# Altium PCB PCB2.PcbDoc
Units mil, origin at the board's own origin, x right, y up, seen from the top; angles counter-clockwise.
Board outline 2674.07 x 3796.52 mil, 2 copper layers (Top Layer, Bottom Layer); 37 components, 33 nets, 116 pads, 5 vias.
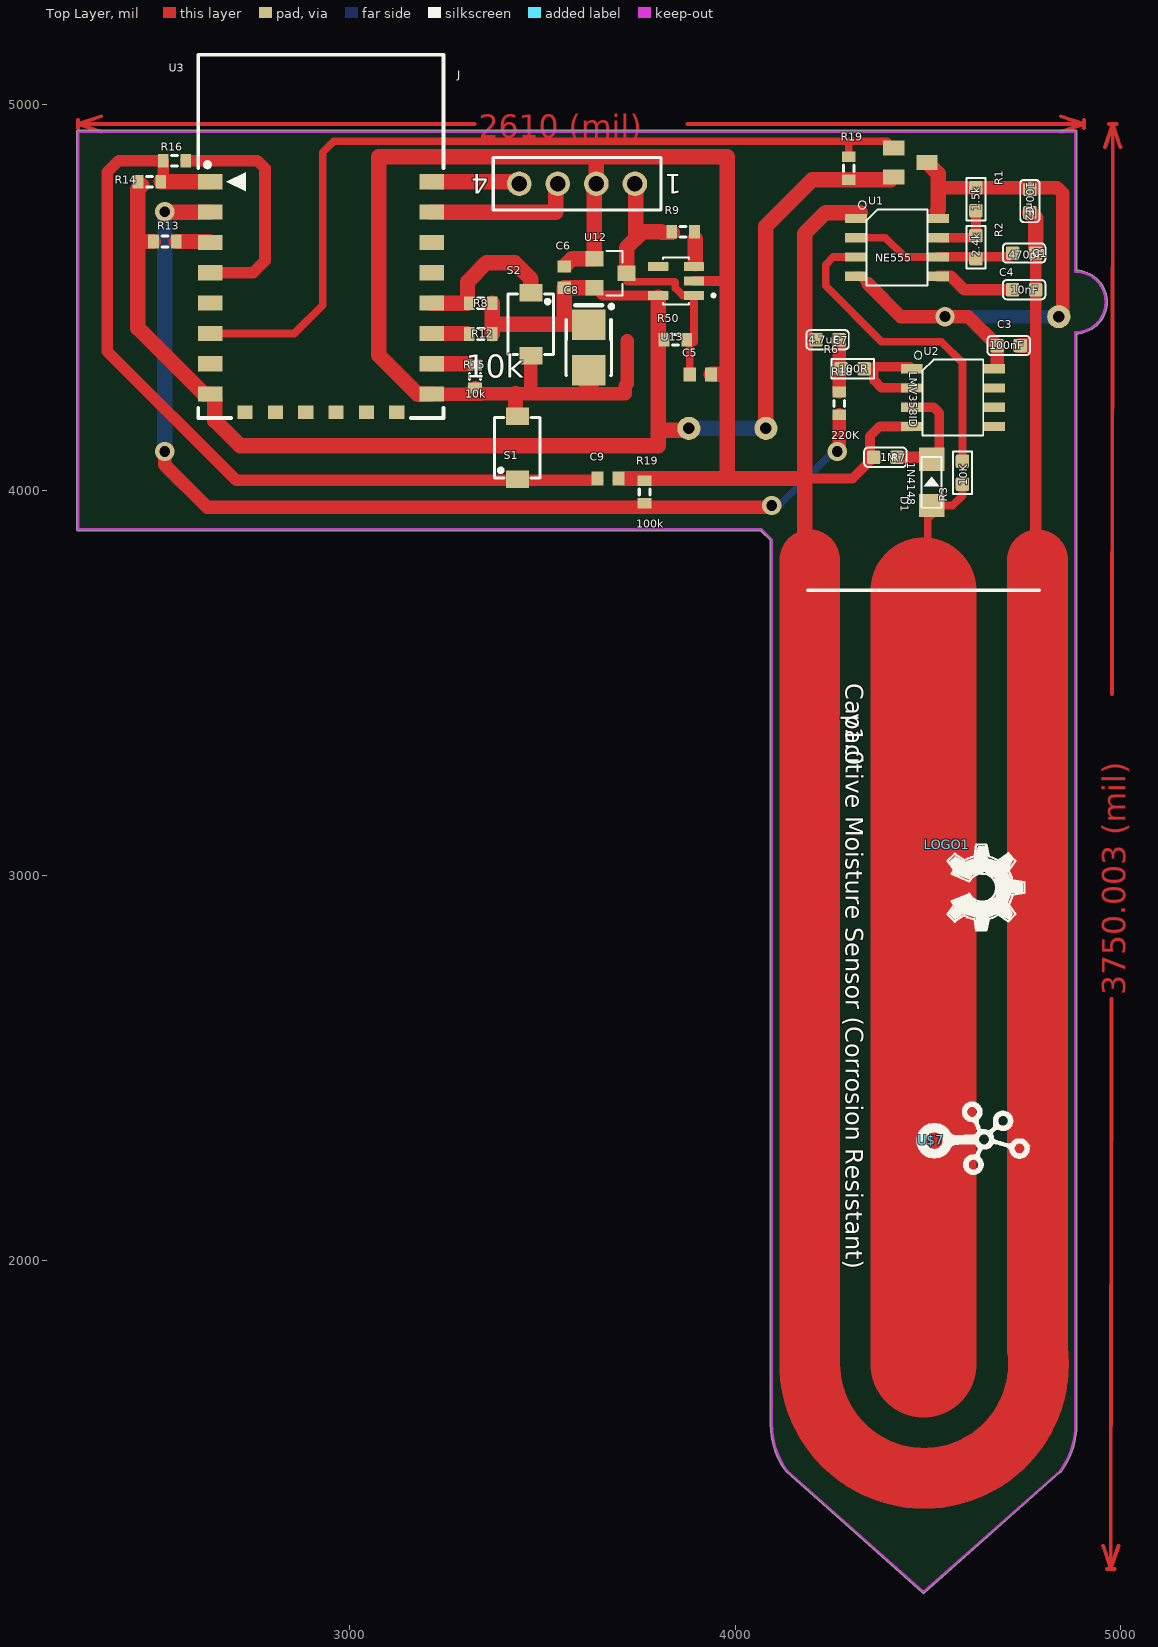
[diagram p0: Top Layer view]
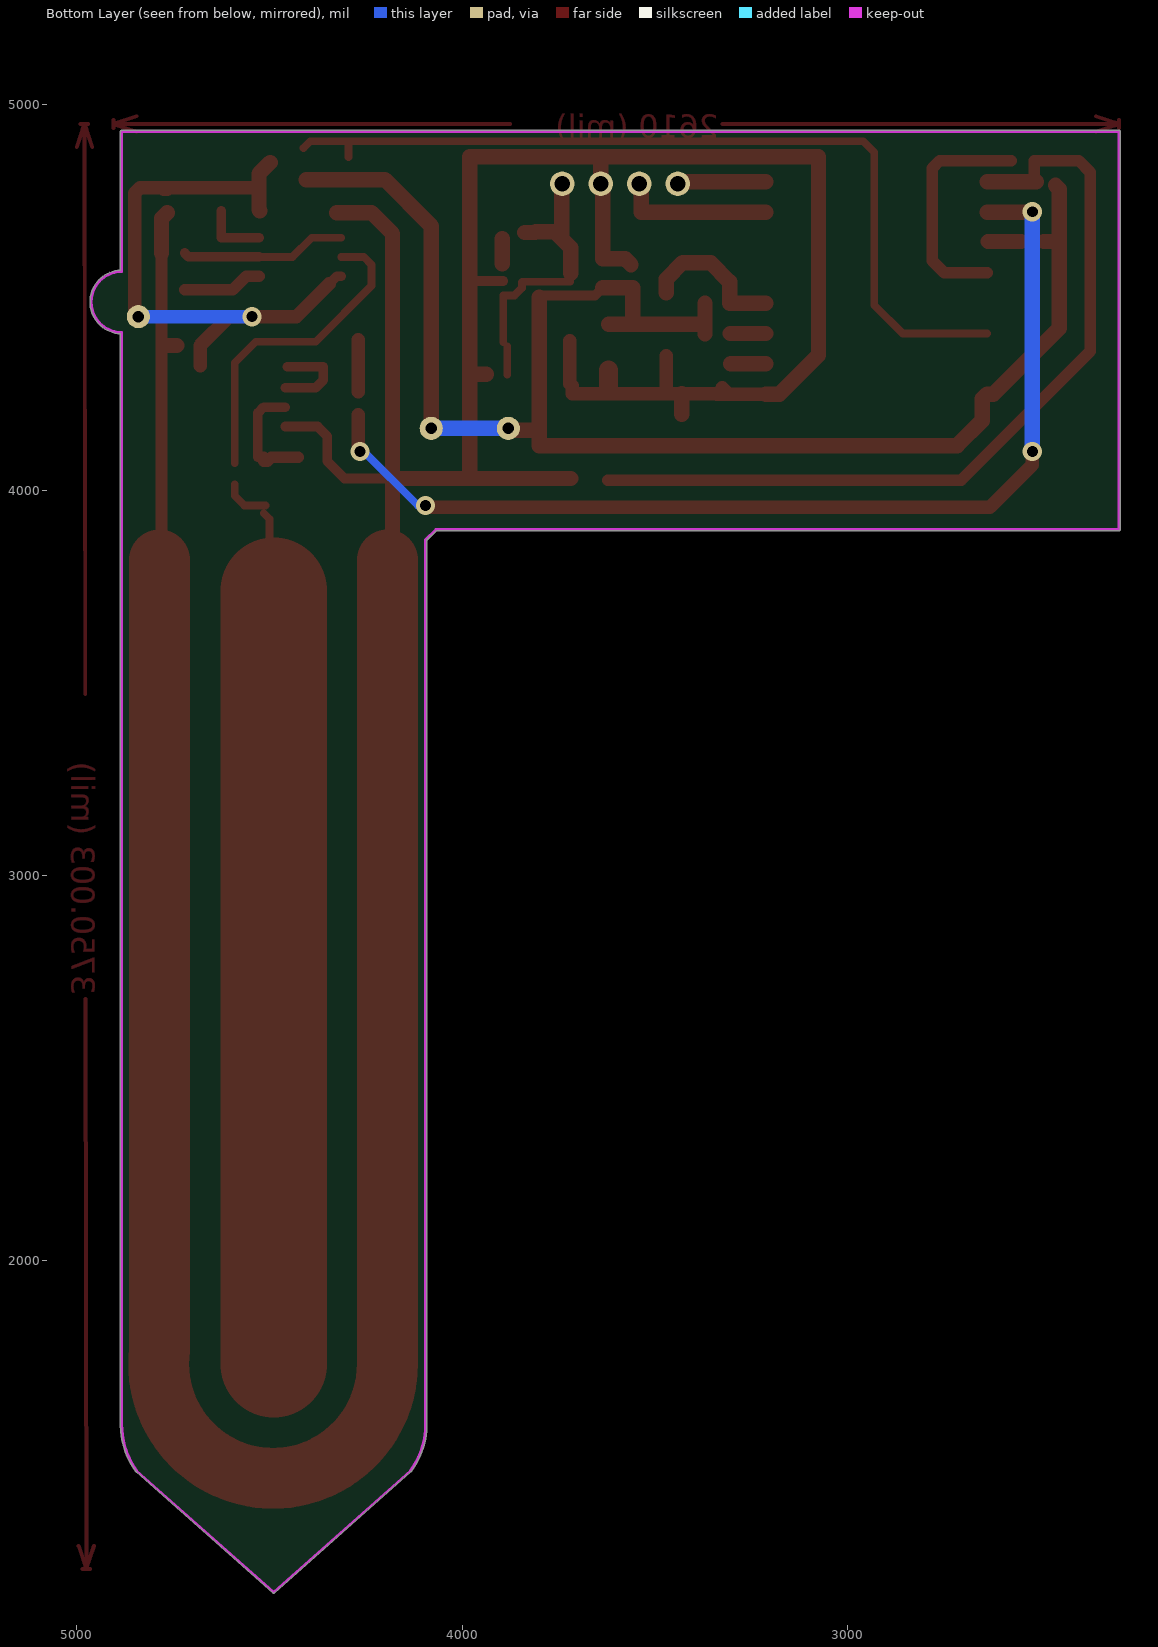
[diagram p1: Bottom Layer view, seen from below]

## Layer stack, top to bottom
Top Solder: solder mask 0.4, Solder Resist, Dk 3.5
Top Layer: signal copper 1.4
Dielectric 1: dielectric 12.6, FR-4, Dk 4.8
Bottom Layer: signal copper 1.4
Bottom Solder: solder mask 0.4, Solder Resist, Dk 3.5

## Board outline
4091.49,1575.01 4091.49,1614 cw(c4095,1614) 4091.49,1614.14 4091.49,3869.54 4066.54,3894.49 2295,3894.49 cw(c2295,3898) 2291.49,3898 2291.49,4930 cw(c2295,4930) 2295,4933.52 4883.04,4933.52 cw(c4883.04,4930) 4886.55,4930 4886.55,4570.44 cw(c4883.04,4488) 4965.55,4488 cw(c4883.04,4488) 4886.55,4405.56 4886.55,1575.01 cw(c4683.54,1573.5) 4886.56,1573.5 cw(c4683.54,1573.5) 4846.87,1452.91 cw(c4844.04,1455) 4844.69,1451.55 4491.04,1137.74 cw(c4489.04,1140) 4487.03,1137.75 4487.04,1137.74 4487.03,1137.75 ccw(c4489.04,1140) 4487.04,1137.74 4487.03,1137.75 4134.05,1451.55 cw(c4134.71,1455) 4131.89,1452.9 cw(c4294.85,1574.56)

## Design rules (kind name [scope] priority, off if disabled: settings)
Clearance Clearance_2 [All] p1: gap=10
Clearance Clearance_1 [All] p2: gap=10
Clearance [All] p3: gap=10
PolygonConnect [All] p1: connectstyle=Relief reliefconductorwidth=10 reliefentries=4 polygonreliefangle="90 Angle" airgapwidth=10
RoutingPriority RoutingPriority_1 [All] p1: routingpriority=0
RoutingPriority [All] p2: routingpriority=0
RoutingVias [All] p1: holewidth=28 width=50 viastyle="Through Hole" minholewidth=28 minwidth=50 maxholewidth=28 maxwidth=50
SolderMaskExpansion [All] p1: expansion=4
Width [All] p1: maxlimit=100 minlimit=10 preferedwidth=10
29 further rules are at their usual default settings.

## Classes and differential pairs
component class Sheet2: C1 C2 C3 C4 C7 D1 LOGO1 R1 R2 R3 R6 R7 R19 U1 U2 U$7 ""
component class Sheet1: C5 C6 C8 C9 J R8 R9 R12 R13 R14 R15 R16 R18 R19 R50 S1 S2 U3 U12 U13

## Components (designator, comment, footprint, x,y, rotation, side; value= is the part's Value field where it differs from the comment)
C1 "470pF" C0603 4750,4615 r270 top
C2 "100nF" C0603 4765,4750 r180 top
C3 "100nF" C0603 4710,4375 r270 top
C4 "10nF" C0603 4750,4519.99 r90.02 top
C5 "" 1608[0603] 3910,4300 r180 top
C6 "" 1608[0603] 3556.65,4552.4 r270 top
C7 "4.7uF" C0603 4240,4390 r270 top
C8 "100uF TAJB107M006RNJ" SMT_C_Tantalum_B 3620,4370 r270 top
C9 "100nf" 1608[0603] 3670,4030 r180 top
D1 "1N4148" LL-34 4510,4020 r270 top
J "SAMTEC-BCS-104-X-S-TE" SAMTEC-BCS-104-X-S-TE 3590,4795 r180 top
LOGO1 "LOGO-OSHW-FILLX0200-NT" OSHW_FILLX200_NOTEXT 4551.04,3080 r270 top
R1 "1.5k" R0603 4625,4755 r180.02 top
R2 "2.4k" R0603 4625,4630 r180.02 top
R3 "10K" R0603 4590,4045 r0 top
R6 "100R" R0603 4305,4315 r270 top
R7 "1M" C0603 4390,4085 r270 top
R8 "10k" J1-0603 3340,4485 r180 top
R9 "100k" J1-0603 3865,4670 r180 top
R12 "10k" J1-0603 3340,4405 r180 top
R13 "10k" J1-0603 2520,4645 r0 top
R14 "10k" J1-0603 2480,4800 r0 top
R15 "10k" J1-0603 3325,4295 r90 top
R16 "0R" J1-0603 2545,4855 r180 top
R18 "220K" J1-0603 4270,4225 r90 top
R19 "100k" J1-0603 3765,3995 r270 top
R19 "Res3" J1-0603 4295,4835 r270 top
R50 "0r" J1-0603 3845,4390 r180 top
S1 "reset" SMT_SW_PTS_820 3435,4110 r90 top
S2 "IO0" SMT_SW_PTS_820 3470,4430 r270 top
U1 "NE555" SOIC8-1.27-5X4MM 4420,4630 r270 top
U2 "LMV358ID" SOIC8-1.27-5X4MM 4565,4240 r270 top
U3 "ESP_12_E" ESP_12_E_L 2610,4800 r0 top
U12 "PMIC-XC6206P122MR(SOT23)" SOT-23 3676.65,4562.4 r270 top
U13 "AP2112K-3.3TRG1" SOT95P285X140-5N 3846.65,4542.4 r180 top
U$7 "LOGO-GROVE" GROVE-SILK-BIG 4509.04,2314 r270 top
? "AO3401" SOT23 4455,4850 r270 top

## Footprints (in the part's own frame and the unit in brackets; to place one, negate y for a bottom-side part, rotate by r counter-clockwise, add the part's x,y. Pads: shape width x height; smd on the part's side, far side on the other; paste and mask are expansions set on the pad)
1608[0603] [mm] "Chip Capacitor, Body 1.6x0.8mm, IPC High Density"
  rect 0.8x0.9 smd: 1(-0.7,0) 2(0.7,0)
  body extent -0.87,-0.48 0.87,0.48, height 1.3
C0603 [mil] "C0603"
  rrect25% 35x35 smd: 1(0,30) 2(0,-30)
  silkscreen extent -25,-55 25,55
ESP_12_E_L [mm]
  rect 1.6x1 smd: 1(0.7,0) 2(0.7,-2) 3(0.7,-4) 4(0.7,-6) 5(0.7,-8) 6(0.7,-10) 7(0.7,-12) 8(0.7,-14) 15(15.3,-14) 16(15.3,-12) 17(15.3,-10) 18(15.3,-8) 19(15.3,-6) 20(15.3,-4) 21(15.3,-2) 22(15.3,0)
  rect 1x0.9 smd: 9(3,-15.2) 10(5,-15.2) 11(7,-15.2) 12(9,-15.2) 13(11,-15.2) 14(13,-15.2)
  silkscreen extent -0.08,-15.57 16.08,8.37, body extent 0,-15.49 16,8.51, height 2.75
GROVE-SILK-BIG [mil] "GROVE-SILK-BIG"
  silkscreen extent -99,-38 91,257
J1-0603 [mm] "Chip Resistor, Body 1.6x0.8mm, IPC High Density"
  rect 0.7x0.9 smd: 1(-0.75,0) 2(0.75,0)
  silkscreen extent -0.2,-0.35 0.2,0.35, body extent -0.85,-0.48 0.85,0.48, height 0.9
LL-34 [mil] "LL-34"
  rect 60x66 smd: A(60,0) C(-60,0)
  silkscreen extent -66,-26 66,26
OSHW_FILLX200_NOTEXT [mil] "OSHW_FILLX200_NOTEXT"
  silkscreen extent 0,0 223,200
R0603 [mil] "R0603"
  rrect25% 35x35 smd: 1(0,30) 2(0,-30)
  silkscreen extent -25,-55 25,55
SAMTEC-BCS-104-X-S-TE [mm]
  round 1.62 hole 1.02 mask+0: 1(-3.81,0) 2(-1.27,0) 3(1.27,0) 4(3.81,0)
  silkscreen extent -5.53,-1.72 5.53,1.72
SMT_C_Tantalum_B [mm]
  rect 2x2.2 smd: 1(-1.5,0) 2(1.5,0)
  silkscreen extent -2.82,-1.5 1.85,1.63, body extent -1.75,-1.4 1.75,1.4, height 1.9
SMT_SW_PTS_820 [mm]
  rect 1.143x1.5 smd: 1(-2.075,0) 2(2.075,0)
  round 0 all layers, no hole paste-2.54 mask-2.54: MH1(0,0.9) MH2(0,-0.9)
  silkscreen extent -2,-1.5 2,1.5, body extent -2.25,-1.55 2.25,1.55, height 2.05
SOIC8-1.27-5X4MM [mil] "SOIC8-1.27-5X4MM"
  rect 24x56 smd: 1(-75,-106.3) 2(-25,-106.3) 3(25,-106.3) 4(75,-106.3) 5(75,107) 6(25,107) 7(-25,107) 8(-75,107)
  silkscreen extent -120,-100 99,79
SOT23 [mm]
  rect 1x1.4 smd: 1(-0.95,-1.1) 2(0.95,-1.1) 3(0,1.1)
SOT95P285X140-5N [mm]
  rrect15% 1.35x0.6 smd: 1(-1.185,0.95) 2(-1.185,0) 3(-1.185,-0.95) 4(1.185,-0.95) 5(1.185,0.95)
  silkscreen extent -2.57,-1.55 0.85,1.55
SOT-23 [mm]
  rect 1.016x1.2 smd: 1(-0.95,-1.06) 2(0.95,-1.06) 3(0,1.06)
  silkscreen extent -1.46,-0.25 1.46,0.8

## Part data
C1 C2 C3 C4 C7 R7: library part CAP-0603, "Ceramic Capacitors"
C5 C6 C9: library part "Cap Semi", "Capacitor (Semiconductor SIM Model)"
C8: library part SMT_C_Tantalum_B, "Capacitor, SM Tantalum; Body 3.5 x 2.8 mm (LxW typ)"
D1: library part DIODE*'1N4148-SMD'
J: "4 Position Receptacle Connector Through Hole"
R1 R2 R3 R6: library part RES-0603
R8 R9 R12 R13 R14 R15 R16 R18 R19 R50: library part Res3, "Resistor"
R19: "Resistor"
S1 S2: library part SMT_SW_PTS_820, "SMT Tactile ?Switch PTS 820 Series"
U1: library part CLOCK/TIMING-NE555'DR', "DIP-8:310110001;SOIC-8:310110013;TSSOP-8:310110002"
U2: library part AMPLIFIER-LMV358'D', "SOIC-8:310020002;MSOP-8:310020007"
U3: "ESP-12 Wi-Fi Module by AI-Thinker"
U12: "Linear Voltage Regulator IC Output"
U13: "Linear Voltage Regulator IC 1 Output 600mA SOT-25"
?: "P-Channel 30V 4A _Ta_ 1.4W _Ta_ Surface Mount SOT-23-3"

## Free pads (board coordinates)
  round 60 hole 30: 2(3880,4160) 3(4080,4160) 4(4840,4450)

## Via types
v1: diameter 50, hole 28, Top Layer to Bottom Layer, 5 vias

## Nets (pads, with @x,y where several pads share a name; then routed paths per layer and width w, separated by ;. In a path a pad name is that pad's centre, name@x,y a point inside that pad or via, vN(x,y) a via of type N, cw(c..) or ccw(c..) an arc to the next point about the centre after c; other vN are vias at no path point)
ADC: C7.1 R6.2 R18.2 | length 135.5
  Top Layer w35: R18.2 C7.1
ADC_IN: R18.1 R19.2@3765,3965.47 U3.2 | length 2716.1
  Top Layer w20: v1@4090,3965 v1(4095,3960) v1@4100,3955
  Top Layer w35: v1(2520,4100) 2520,4065 2630,3955 4080,3955 v1@4090,3965 ; v1@4270,4115 R18.1
  Top Layer w40: v1@2521.21,4721.26 U3.2
  Bottom Layer w20: v1(4095,3960) 4115,3960 4255,4100 v1(4265,4100)
  Bottom Layer w40: v1(2520,4100) v1(2520,4722.47)
EN: R13.2 U3.3 | length 85.6
  Top Layer w40: R13.2 U3.3@2635.08,4645
GND: C1.1 C2.1 C3.1 C4.2 C5.1 C6.1 C7.2 C8.2 C9.1 J.2 R7.2 R15.1 R19.1@3765,4024.53 S1.2 S2.2 U1.1 U2.4 U3.15 U12.1 U13.2 | length 11721.6
  Top Layer w10: 4183.72,3818 4193.76,3818 4193.76,3864 ; 4789.04,3858 4789.04,3822 4785.04,3818 4834.04,3818
  Top Layer w20: J.2@3634.92,4774.92 J.2@3645,4785 ; 4780,3877.04 4775,3872.04 4789.04,3858
  Top Layer w25: U13.2 3977.4,4542.4 ; 4180.48,4030 4305,4030 4350,4075 4350,4140 4375,4165 U2.4
  Top Layer w30: 4780,3877.04 C4.2 C1.1@4780,4605
  Top Layer w35: U3.15 3308.35,4248.82 ; R15.1 3308.35,4248.82 ; 3339.29,4248.82 3308.35,4248.82 ; 3340.47,4250 3430,4250 3470,4250 ; S2.2 3470,4250 ; 3714.55,4270.04 3714.55,4250 3470,4250 ; 3720,4275.49 3720,4387.44
  Top Layer w39.88: 4180.48,3845 4180.48,4030
  Top Layer w40: U3.15 3176.18,4248.82 3075,4350 3075,4865 3640,4865 ; S1.2@3430,4196.69 3430,4250 ; C6.1@3561.65,4584.96 3576.5,4599.8 U12.1@3622.85,4599.8 ; U12.1@3624.92,4599.8 U12.1 J.2@3634.92,4774.92 ; J.2@3640,4790 3640,4865 ; 3717.56,4030 4180.48,4030 4180.48,4665.48 4235,4720 4325,4720 ; C5.1 3975,4300 ; 3980,4035 3980,4865 3640,4865 ; C3.1 4770,4375 ; C2.1 4780,4705 C1.1
  Top Layer w50: 3620,4260 C8.2
  Top Layer w158: 4193.76,3818 4193.76,1732 ccw(c4490.56,1732.02) 4785.04,1769 4785.04,3818
GPIO0: R8.2 S2.1 U3.18 | length 387
  Top Layer w40: U3.18 3305.43,4485.04 3305.43,4540.43 3355,4590 3427.57,4590 3470,4547.57 S2.1
GPIO2: R12.2 U3.17 | length 91.8
  Top Layer w40: U3.17 R12.2@3304.17,4406.3
GPIO4: U3.19
GPIO5: U3.20
GPIO9: U3.11
GPIO10: U3.12
GPIO12: ?.1 R19.1@4295,4864.53 U3.6 | length 2255.7
  Top Layer w20: U3.6 2856.3,4406.3 2930,4480 2930,4876.5 2958.5,4905 4290,4905 ; R19.1@4295,4864.53 4295,4905 4394.09,4905 ?.1
GPIO13: U3.7
GPIO14: U3.5
GPIO15: R15.2 U3.16 | length 90.6
  Top Layer w40: U3.16 3302.91,4327.56
GPIO16: R16.1 U3.4 | length 609.1
  Top Layer w30: R16.1 2760,4855 2780,4835 2780,4595 2748.78,4563.78 U3.4
NetC1_2: C1.2 R2.1 U1.2 U1.6 | length 431.2
  Top Layer w20: U1.2 4390,4655 4440,4605 U1.6
  Top Layer w25: U1.6 4641.56,4605 4710,4605 C1.2
NetC4_1: C4.1 U1.5 | length 207.5
  Top Layer w30: U1.5 4560,4555 4595.01,4519.99 C4.1
NetD1_A: D1.A R3.2 | length 2342.7
  Top Layer w10: 4489.04,3739 4489.04,3816
  Top Layer w20: 4489.04,3816 4489.04,3824.04 4500,3835 4500,3925 D1.A@4515,3940 ; 4501.04,3842 4502.04,3840 ; D1.A 4565,3960 4590,3985 R3.2
  Top Layer w25: 4488.64,3816 4489.04,3816
  Top Layer w276: 4489.04,1731 4489.04,3739
NetD1_C: D1.C R7.1 U2.3 | length 296.7
  Top Layer w25: U2.3 4515,4215 4530,4200 D1.C@4530,4085
  Top Layer w30: R7.1@4425,4085 4495,4085 4505,4075 4515,4075 D1.C@4515,4085
NetR1_1: R1.1 R2.2 U1.7 | length 168
  Top Layer w25: U1.7 4624.99,4655 R1.1
NetR3_1: R3.1 U1.3 | length 839.8
  Top Layer w20: U1.3 4255,4605 4235,4584.99 4235,4530 4380,4385 4535,4385 4590,4330 R3.1@4590,4070
NetR6_1: R6.1 U2.1 U2.2 | length 235.7
  Top Layer w25: U2.1@4453.69,4320 4360,4320 4360,4285 4380,4265 U2.2
NetR9_1: R9.1 U13.3 | length 65.3
  Top Layer w40: U13.3@3896.18,4587.09 R9.1@3896.18,4652.4
NRST: C9.2 R14.2 R16.2 S1.1 U3.1 | length 2198.9
  Top Layer w30: R14.2@2515.47,4805.94 R16.2 2400,4855 2370,4825 2370,4360 2705,4025 3622.44,4025
  Top Layer w40: R14.2@2515.47,4805.94 2510,4800.47 2510,4800 U3.1
RXD0: J.3 U3.21 | length 397.6
  Top Layer w40: U3.21 3535,4721.26 3535,4775 J.3@3550,4790
SPI_CLK: U3.14
SPI_INT: U3.13
SPI_MISO: U3.10
SPI_MOSI: U3.9
TXD0: J.4 U3.22 | length 227.6
  Top Layer w40: U3.22 J.4@3440,4800
VBAT: C5.2 J.1 R9.2 R50.1 U12.3 U13.1 | length 752.4
  Top Layer w20: U12.3 3720,4560.79 3720,4540.67 3843.39,4540.67 3844.51,4539.55 3844.51,4524.55 3864.06,4505 U13.1 3893.31,4383.31 ; C5.2 R50.1@3882.44,4372.44
  Top Layer w40: U12.3 3718.39,4629.13 3759.25,4670 3808.35,4670 3810,4668.35 R9.2@3837.13,4668.35 ; 3741.65,4652.4 J.1@3741.65,4788.35
VCC3V3: ?.2 C6.2 C8.1 pad.2 pad.3 R8.1 R12.1 R13.1 R14.1 R19.2@4295,4805.47 R50.2 U3.8 U12.2 U13.5 | length 4219.8
  Top Layer w25: U12.2 3654.92,4505 U13.5 U13.5@3800,4500.67
  Top Layer w40: 2450,4645 R13.1 ; R14.1@2460,4790.47 2450,4780.47 2450,4420 2621.18,4248.82 U3.8 2650,4236.38 2650,4180 2715,4115 3800,4115 3800,4155 ; R12.1 R8.1 3369.53,4430 3556.65,4430 ; C6.2 3556.65,4430 ; C6.2@3556.81,4525 U12.2 ; C8.1@3619.06,4430 3556.65,4430 ; U13.5@3800,4500.67 3800,4155 ; pad.2@3875,4155 3800,4155 ; pad.3 4080,4685 4200.47,4805.47 4295,4805.47 ?.2@4404.57,4805.47
  Bottom Layer w40: pad.2 pad.3
VCC_SEN: ?.3 C2.2 C3.2 pad.4 R1.2 U1.4 U1.8 U2.8 | length 1590.8
  Top Layer w25: U1.4 4325,4555 4345,4535
  Top Layer w35: 4345,4535 4430,4450 v1(4545,4450) 4605,4450 C3.2 U2.8@4680,4323.01 ; 4532,4785 4835,4785 4850,4770 4850,4460 pad.4 ; C2.2 C2.2@4774.79,4780
  Top Layer w40: ?.3 4527,4821.31 4527,4790 ; 4525,4725 4527,4727 4527,4790 ; 4532,4785 4527,4790
  Bottom Layer w35: v1(4545,4450) pad.4
pads on no net: S1.MH1 S1.MH2 S2.MH1 S2.MH2 U2.5 U2.6 U2.7 U13.4
copper on no net: | length 5602.4
  Top Layer w10: 2295,4940 2295,4960 ; 2355,4930 2295,4950 ; 2355,4970 2295,4950 ; 3324.08,4950 2295,4950 ; 3875.92,4950 4905,4950 ; 4845,4930 4905,4950 ; 4845,4970 4905,4950 ; 4905,4940 4905,4960 ; 4955.08,1260.03 4975,1200 ; 4959.92,4890.03 4980,4950 ; 4965,1200.01 4985,1199.99 ; 4970,4950.01 4990,4949.99 ; 4976.97,2679.12 4975,1200 ; 4978.03,3470.88 4980,4950 ; 4995.08,1259.97 4975,1200 ; 4999.92,4889.97 4980,4950

## Keep-outs
Keep-Out Layer:
  lines w6: 4134.71,1455 4489.04,1140 4844.04,1455
  lines w7: 4134.71,1455 cw(c4294.85,1574.56) 4095,1575 4095,1614 4095,3871 4068,3898 3953,3898 2295,3898 2295,4854 2295,4930 3971.37,4930 4086.37,4930 4770,4930 4883.04,4930 4883.04,4875 ; 4844.04,1455 ccw(c4683.54,1573.5) 4883.04,1575 4883.04,1614 4883.04,4409 ccw(c4883.04,4488) 4883.04,4567 4883.04,4843 4883.04,4881.96

## Other copper
Top Layer:
  text "2610 (mil)" at 3334.08,4914.01 h60
  text "3750.003 (mil)" at 5012.98,2689.08 h60 r89.92

## Silkscreen, mask and mechanical layers (free items; w line width, h text height)
Top Overlay:
  lines w10: 4189.04,3740 4789.04,3740
  text "Capacitive Moisture Sensor (Corrosion Resistant)" at 4272.04,3498.5 h77.5 r270
  text "v1.0" at 4272.04,3421 h77.5 r270

## Text inside footprints (layer, text, board x,y; h text height)
J: Top Overlay "1" at 3861.65,4820 h50 r180; Top Overlay "4" at 3358.86,4820 h50 r180; Mechanical 13 "2.540" at 4060.98,4800 h10 r180; Mechanical 13 "1" at 3861.65,4820 h50 r180; Mechanical 13 "2.540" at 3840.98,4712.48 h10 r180; Mechanical 13 "10.160" at 3621.5,5067.52 h10 r180; Mechanical 13 "7.620" at 3615.98,4690 h10 r180; Mechanical 13 "4" at 3358.86,4820 h50 r180
U3: Mechanical 13 "ANTENNA AREA" at 2669,5108 h10; Mechanical 13 "CUTOUT POLYGON" at 2669,5088 h10